# Altium PCB pcb.PcbDoc
Units mm, origin at the board's own origin, x right, y up, seen from the top; angles counter-clockwise.
Board outline 33.02 x 32.38 mm, 2 copper layers (Top Layer, Bottom Layer), stack 1.571 mm thick; 21 components, 14 nets, 49 pads, 2 vias.
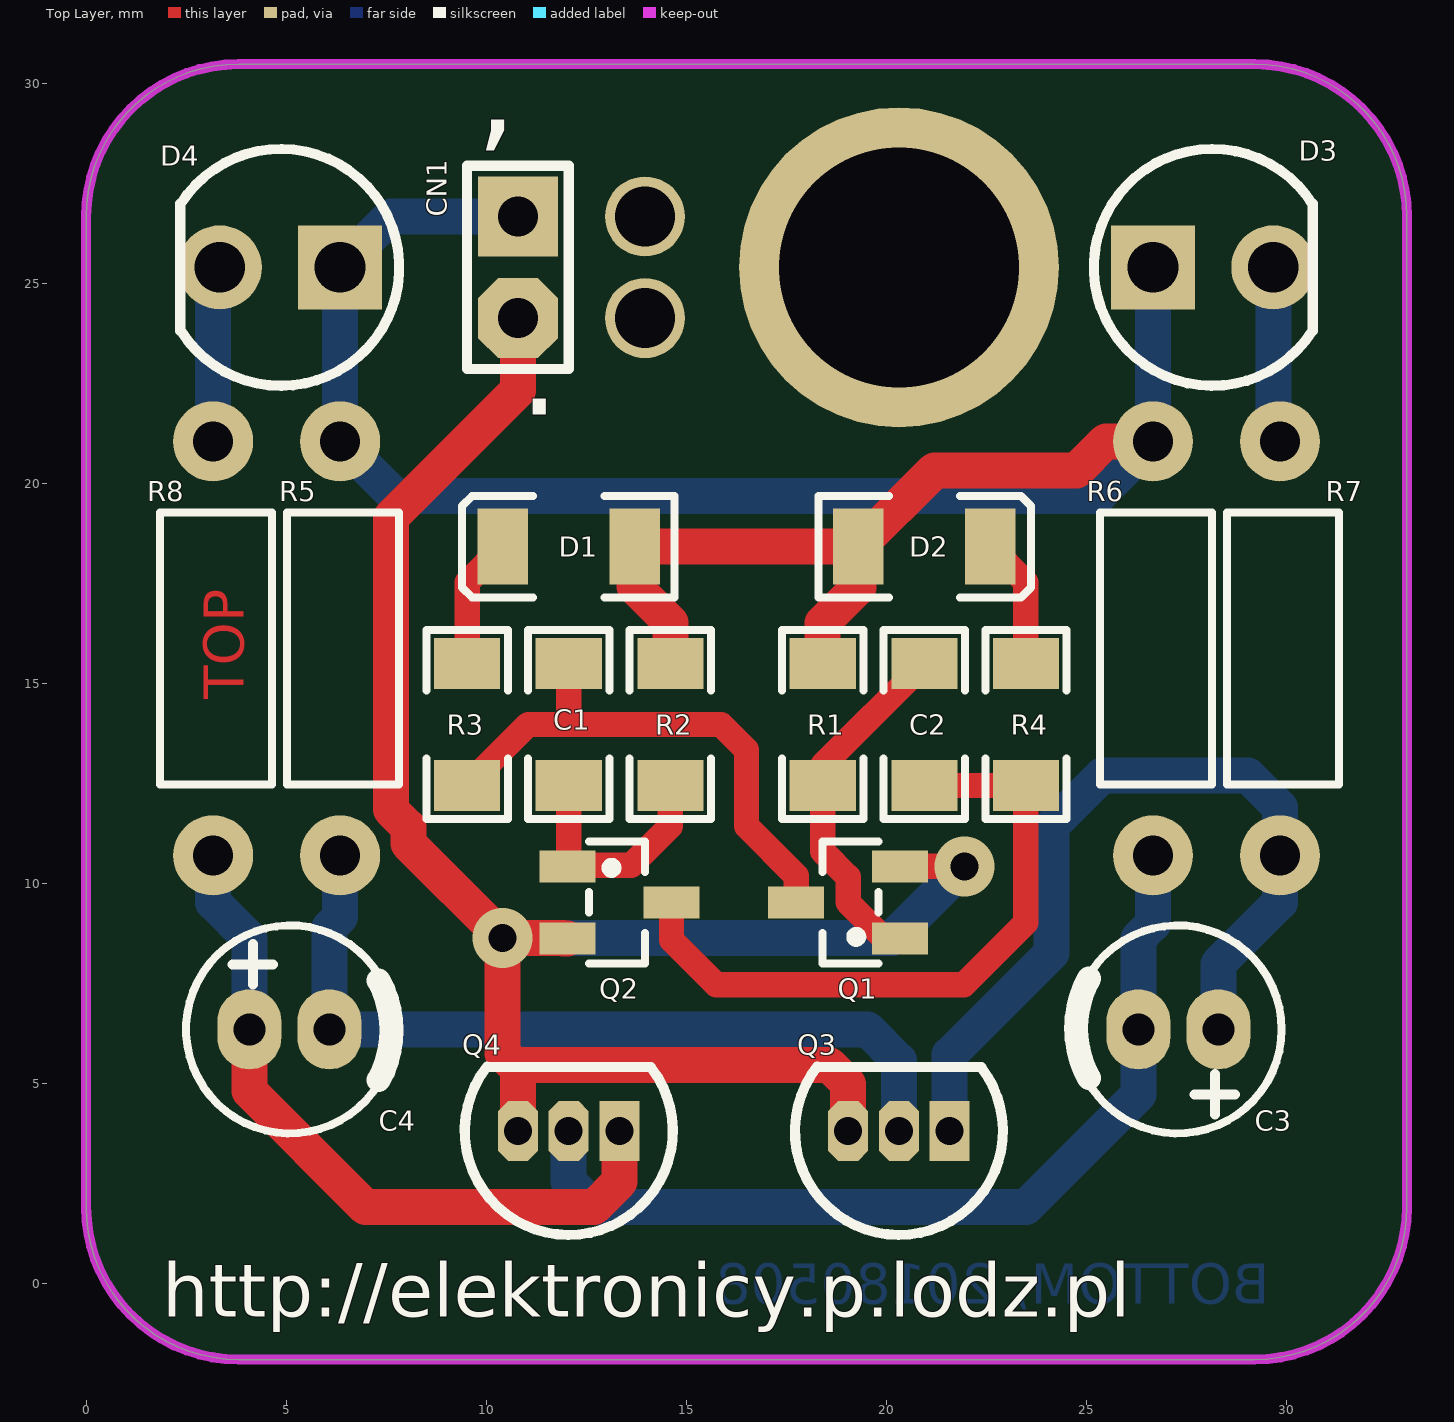
[diagram p0: Top Layer view]
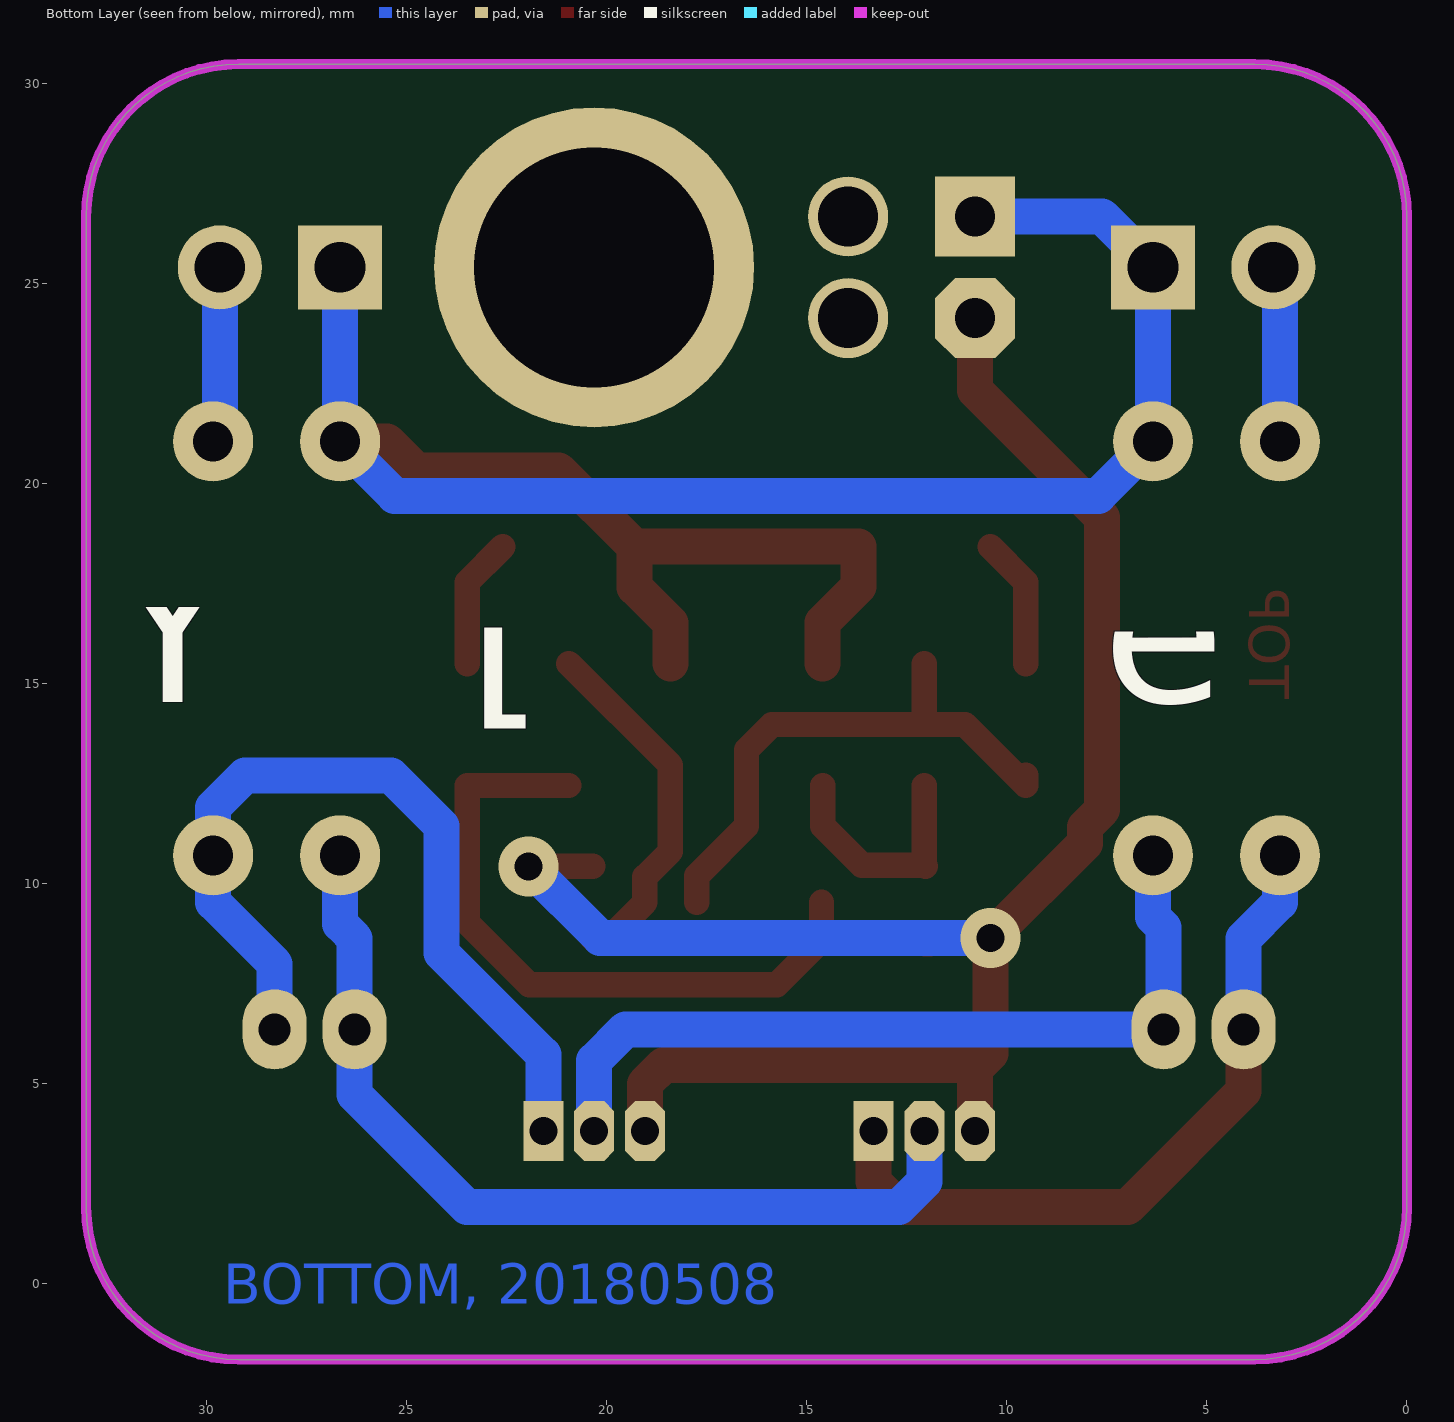
[diagram p1: Bottom Layer view, seen from below]
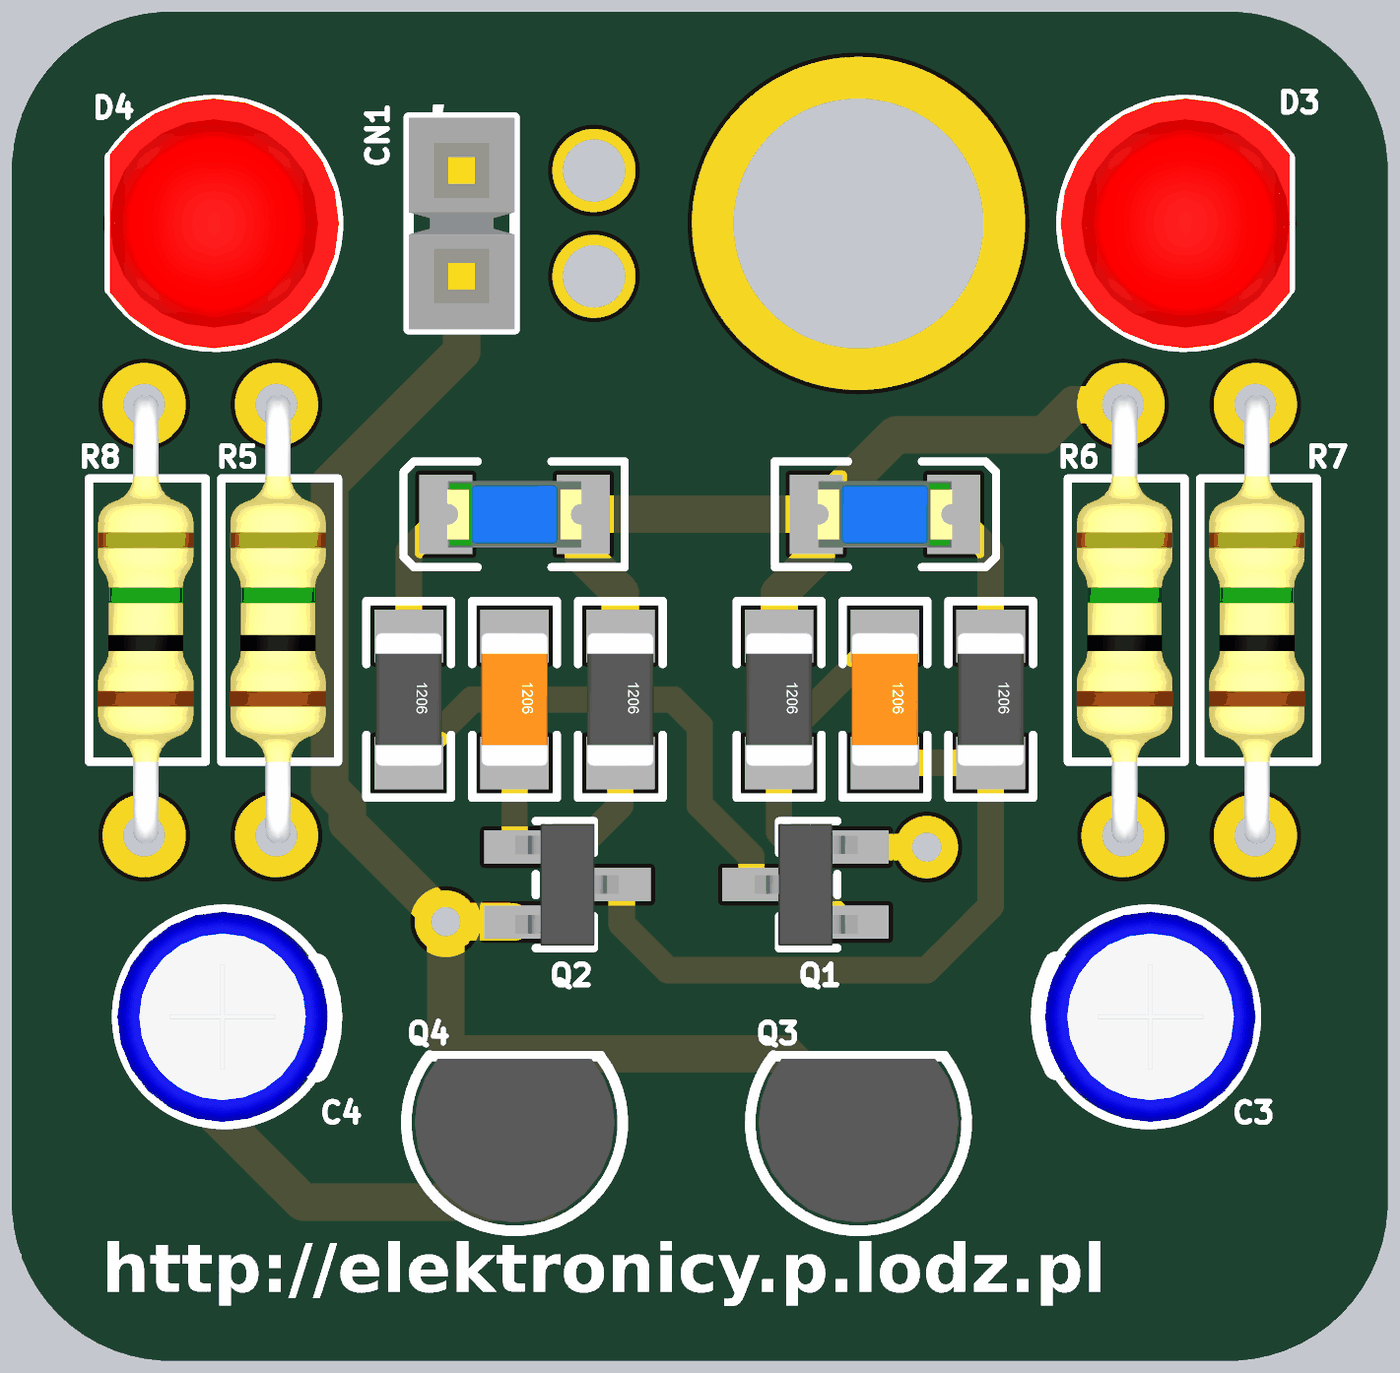
[diagram p2: 3D render of the assembled board from above, using the file's embedded part models]

## Layer stack, top to bottom
Top Solder: solder mask 0.0102, Solder Resist, Dk 3.5
Top Layer: signal copper 0.0356
Dielectric 1: dielectric 1.5, FR-4, Dk 4.8
Bottom Layer: signal copper 0.0356
Bottom Solder: solder mask 0.0102, Solder Resist, Dk 3.5

## Board outline
0,1.905 0,26.67 cw(c3.81,26.67) 3.81,30.48 29.21,30.48 cw(c29.21,26.67) 33.02,26.67 33.02,1.905 cw(c29.21,1.905) 29.21,-1.905 3.81,-1.905 cw(c3.81,1.905)

## Design rules (kind name [scope] priority, off if disabled: settings)
Clearance [All] p1: gap=0.254 ignorepadtopadclearanceinfootprint=FALSE except(0: Arc-Hole Track-Hole SMDPad-Hole THPad-Hole Via-Hole Fill-Hole Poly-Hole Region-Hole Text-Hole)
PolygonConnect [All] p1: connectstyle=Relief reliefconductorwidth=0.254 reliefentries=4 polygonreliefangle="90 Angle" airgapwidth=0.254
RoomDefinition main [InComponentClass('main')] p1: confinementstyle=ConfineIn formatcopy=TRUE lockcomponents=FALSE outline -37.846,-68.326 220.599,-68.326 220.599,33.02 -37.846,33.02
RoutingVias [All] p1: holewidth=0.5 width=1 viastyle="Through Hole" minholewidth=0.7 minwidth=1 maxholewidth=0.5 maxwidth=1.4
SolderMaskExpansion [All] p1: expansion=0.102
Width [All] p1: maxlimit=1.27 minlimit=0.254 preferedwidth=0.635
30 further rules are at their usual default settings.

## Components (designator, comment, footprint, x,y, rotation, side; value= is the part's Value field where it differs from the comment)
C1 "10u/25V" C1206 12.065,13.97 r270 top
C2 "10u/25V" C1206 20.955,13.97 r270 top
C3 "10u/25V" CE5x11-2 27.305,6.35 r180 top
C4 "10u/25V" CE5x11-2 5.08,6.35 r0 top
CN1 "CN_2x1" GP_2x1 10.795,26.67 r270 top
D1 "BLUE" LED1206B 12.065,18.415 r180 top
D2 "BLUE" LED1206B 20.955,18.415 r0 top
D3 "LED" LED-POLARIZED 29.17,25.4 r0 top
D4 "LED" LED-POLARIZED 3.85,25.4 r180 top
Q1 "BC847B" SOT-23 19.05,9.525 r90 top
Q2 "BC847B" SOT-23 13.335,9.525 r270 top
Q3 "BC547" TO-92A 20.32,3.81 r180 top
Q4 "BC547" TO-92A 12.065,3.81 r180 top
R1 "68k" R1206 18.415,13.97 r270 top
R2 "68k" R1206 14.605,13.97 r270 top
R3 "1k" R1206 9.525,13.97 r270 top
R4 "1k" R1206 23.495,13.97 r270 top
R5 "68k" RES10.35-6.8X2.8 6.35,15.875 r90 top
R6 "68k" RES10.35-6.8X2.8 26.67,15.875 r90 top
R7 "1k" RES10.35-6.8X2.8 29.845,15.875 r90 top
R8 "1k" RES10.35-6.8X2.8 3.175,15.875 r90 top

## Footprints (in the part's own frame and the unit in brackets; to place one, negate y for a bottom-side part, rotate by r counter-clockwise, add the part's x,y. Pads: shape width x height; smd on the part's side, far side on the other; paste and mask are expansions set on the pad)
C1206 [mil]
  rect 50x65 smd: 1(-60,0) 2(60,0)
  silkscreen extent -93,-40 93,40, body extent -63,-31 63,32, height 39
CE5x11-2 [mm] "Aluminium Electrolytic Capacitor -  Radius: 5mm, Height: 11mm, PinSpacing: 2mm"
  oval 1.6x2 hole 0.8: 1(-1,0) 2(1,0)
  silkscreen extent -2.58,-2.6 2.61,2.6, body extent -2.55,-2.53 2.5,2.53, height 11.33
GP_2x1 [mm]
  rect 2x2 hole 1: 1(0,0)
  oct 2x2 hole 1: 2(2.54,0)
  silkscreen extent -1.27,-1.27 3.81,1.27, body extent -1.27,-1.27 3.81,1.27, height 8.38
LED1206B [mm]
  rect 1.27x1.9 smd: 1(-1.65,0) 2(1.65,0)
  silkscreen extent -2.64,-1.27 2.67,1.27, body extent -1.61,-0.8 1.61,0.8, height 1.1
LED-POLARIZED [mm]
  rect 2.1x2.1 hole 1.27: 1(-2.5,0)
  round 2.1 hole 1.27: 2(0.508,0)
  silkscreen extent -3.97,-2.96 1.5,2.96, body extent -4,-3 1.5,3, height 8.5
R1206 [mil]
  rect 50x65 smd: 1(-60,0) 2(60,0)
  silkscreen extent -93,-40 93,40, body extent -63,-31 63,32, height 39
RES10.35-6.8X2.8 [mm] "Resistor, Axial; Body 6.8 x 2.8 mm (LxDia. max), Lead Dia. 0.65 mm (max)"
  round 2 hole 1: 1(-5.175,0) 2(5.175,0)
  silkscreen extent -3.4,-1.48 3.4,1.32, body extent -5.36,-1.19 5.41,1.12, height 2.54
SOT-23 [mm]
  rect 0.8x1.4 smd: 1(-0.9,-1.3) 2(0.9,-1.3) 3(0,1.3)
  silkscreen extent -1.52,-0.76 1.52,0.64, body extent -1.46,-1.25 1.46,1.23, height 1
TO-92A [mm]
  rect 1x1.5 hole 0.7: 1(-1.27,0)
  oct 1x1.5 hole 0.7: 2(0,0) 3(1.27,0)
  silkscreen extent -2.6,-1.61 2.6,2.6, body extent -2.4,-1.53 2.4,2.4, height 8

## Part data
C1 C2: library part Cap, "Capacitor", ComponentLink1Description=datasheet, ComponentLink2Description=supplier
C3 C4: library part "Cap Pol", "Polarized Capacitor", ComponentLink1Description=datasheet, ComponentLink2Description=supplier
D1 D2: library part LED_BLUE, "BLUE LED", Published=04-Apr-2006
D3 D4: "Typical RED, GREEN, YELLOW, AMBER GaAs LED", Published=04-Apr-2006
Q1 Q2: "NPN General Purpose Transistor (VCE=45V, IC=100mA, HFE=200-450)", PowerRating=250mW, Supplier Part Number 1=BC847B.215, HFE=200-450, IC=100mA, Supplier 1=TME, Supplier 2=TME, Supplier 3=TME, Supplier 4=Farnell, Supplier 5=Farnell, Supplier 6=Farnell, Supplier 7=Farnell, Supplier 8=Farnell, Supplier 9=Farnell, Supplier Part Number 2=BC847B-DIO, Supplier Part Number 3=BC847B.235, Supplier Part Number 4=1562449, Supplier Part Number 5=1081232, Supplier Part Number 6=1081232RL, Supplier Part Number 7=1773608RL, Supplier Part Number 8=2336781, Supplier Part Number 9=1574343, VCEO=45V
Q3 Q4: "NPN General Purpose Transistor (VCE=45V, IC=100mA)", Published=21-Mar-2006
R1 R2 R3 R4 R5 R6 R7 R8: library part Res, "Resistor", ComponentLink1Description=datasheet, ComponentLink2Description=supplier, Published=19-Feb-2006

## Free pads (board coordinates)
  round 2 hole 1.5: 2(13.97,26.67) 3(13.97,24.13)
  round 8 hole 6: 4(20.32,25.4)

## Via types
v1: diameter 1.5, hole 0.7, Top Layer to Bottom Layer, 2 vias

## Nets (pads, with @x,y where several pads share a name; then routed paths per layer and width w, separated by ;. In a path a pad name is that pad's centre, name@x,y a point inside that pad or via, vN(x,y) a via of type N, cw(c..) or ccw(c..) an arc to the next point about the centre after c; other vN are vias at no path point)
GND: CN1.2 Q1.2 Q2.2 Q3.3 Q4.3 | length 48.1
  Top Layer w0.635: Q1.2 v1(21.96,10.425)
  Top Layer w0.9: Q4.3 10.795,5.366 10.414,5.747 v1(10.414,8.636) ; 10.795,5.461 18.574,5.461 19.05,4.985 Q3.3 ; CN1.2 10.795,22.32 7.62,19.145 7.62,11.84 8.054,11.406 8.054,10.996 v1(10.414,8.636) ; Q2.2 11.94,8.625 11.929,8.636 v1(10.414,8.636)
  Bottom Layer w0.9: v1(10.414,8.636) 20.171,8.636 v1(21.96,10.425)
NetC1_1: C1.1 Q1.3 R3.2 | length 14
  Top Layer w0.635: R3.2@9.525,12.7 R3.2 11.049,13.97 12.035,13.97 ; C1.1 12.065,14 12.035,13.97 ; Q1.3 17.75,10.19 16.51,11.43 16.51,13.335 15.875,13.97 12.035,13.97
NetC1_2: C1.2 Q2.1 R2.2 | length 6
  Top Layer w0.635: Q2.1 12.065,10.455 13.63,10.455 14.605,11.43 R2.2 ; Q2.1@12.065,10.497 C1.2
NetC2_1: C2.1 Q1.1 R1.2 | length 9
  Top Layer w0.635: Q1.1 19.95,8.625 19.05,9.525 19.05,10.16 18.415,10.795 R1.2 18.415,12.954 C2.1
NetC2_2: C2.2 Q2.3 R4.2 | length 16.9
  Top Layer w0.635: Q2.3 14.635,8.581 15.748,7.468 21.946,7.468 23.495,9.017 R4.2 C2.2
NetC3_1: C3.1 Q3.1 R7.1 | length 21.4
  Bottom Layer w0.9: Q3.1 21.59,5.715 24.13,8.255 24.13,11.43 25.4,12.7 29.043,12.7 29.845,11.898 R7.1 29.845,9.525 28.305,7.985 C3.1
NetC3_2: C3.2 Q4.2 R6.1 | length 23.1
  Bottom Layer w0.9: Q4.2 12.065,2.54 12.7,1.905 23.495,1.905 26.305,4.715 C3.2 26.305,8.62 26.67,8.985 R6.1
NetC4_1: C4.1 Q4.1 R8.1 | length 18.3
  Top Layer w0.9: C4.1 4.08,4.81 6.985,1.905 12.7,1.905 13.335,2.54 Q4.1
  Bottom Layer w0.9: R8.1 3.175,9.525 4.08,8.62 C4.1
NetC4_2: C4.2 Q3.2 R5.1 | length 20.8
  Bottom Layer w0.9: R5.1 6.35,9.16 6.08,8.89 C4.2 19.536,6.35 20.32,5.566 Q3.2
NetD1_2: D1.2 R3.1 | length 3.3
  Top Layer w0.635: R3.1 9.525,17.525 D1.2
NetD2_2: D2.2 R4.1 | length 3.3
  Top Layer w0.635: D2.2 23.495,17.525 R4.1
NetD3_2: D3.2 R7.2 | length 4.4
  Bottom Layer w0.635: R7.2@29.678,21.217 R7.2
  Bottom Layer w0.9: R7.2@29.678,21.217 D3.2
NetD4_2: D4.2 R8.2 | length 3.8
  Bottom Layer w0.635: D4.2@3.175,24.598 D4.2@3.342,24.765
  Bottom Layer w0.9: R8.2 D4.2@3.175,24.598
VCC: CN1.1 D1.1 D2.1 D3.1 D4.1 R1.1 R2.1 R5.2 R6.2 | length 55.1
  Top Layer w0.9: R2.1 14.605,16.526 13.715,17.416 D1.1 D2.1 ; R1.1 18.415,16.51 19.305,17.4 D2.1 ; R6.2@26.035,21.05 25.495,21.05 24.765,20.32 21.21,20.32 D2.1
  Bottom Layer w0.9: CN1.1 7.62,26.67 D4.1 R5.2 7.715,19.685 25.305,19.685 R6.2 D3.1

## Keep-outs
Keep-Out Layer:
  lines w0.254: 0,1.905 ccw(c3.81,1.905) 3.81,-1.905 29.21,-1.905 ccw(c29.21,1.905) 33.02,1.905 33.02,26.67 ccw(c29.21,26.67) 29.21,30.48 3.81,30.48 ccw(c3.81,26.67) 0,26.67 0,5.08 0,1.905

## Other copper
Top Layer:
  text "TOP" at 3.937,14.605 h1 r90
Bottom Layer:
  text "BOTTOM, 20180508" at 29.591,-0.508 h1

## Silkscreen, mask and mechanical layers (free items; w line width, h text height)
Top Overlay:
  text "," at 9.751,27.94 h4
  text "." at 11.839,22.86 h4 r180
  text "http://elektronicy.p.lodz.pl" at 1.905,-1.27 h2.3
Bottom Overlay:
  text "e" at 7.62,12.065 h13
  text "[" at 23.495,12.065 h13
  text "Y" at 32.385,12.065 h13